# Altium PCB Fuse Block - Open (Box-KA11 Masterkit).PcbDoc
Units mm, origin at the board's own origin, x right, y up, seen from the top; angles counter-clockwise.
Board outline 82.5 x 57 mm, 2 copper layers (Top Layer, Bottom Layer); 13 components, 10 nets, 44 pads, 0 vias.
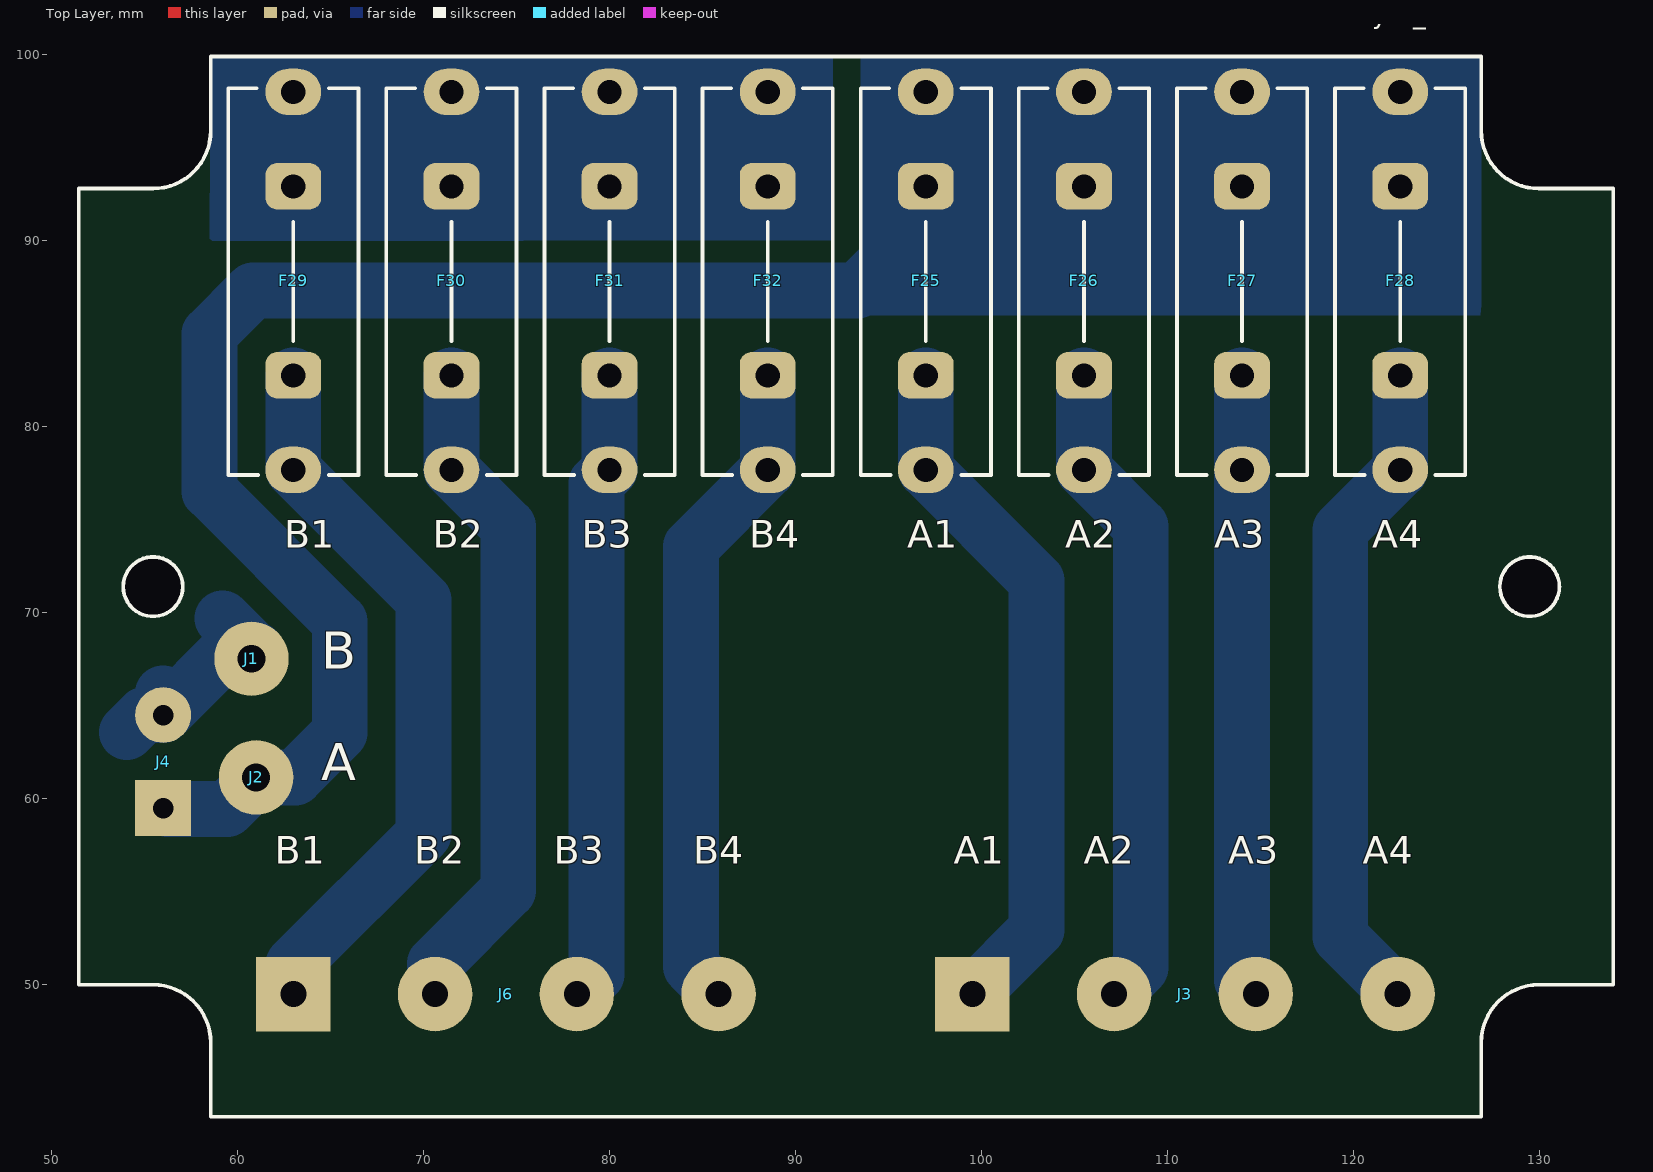
[diagram p0: Top Layer view]
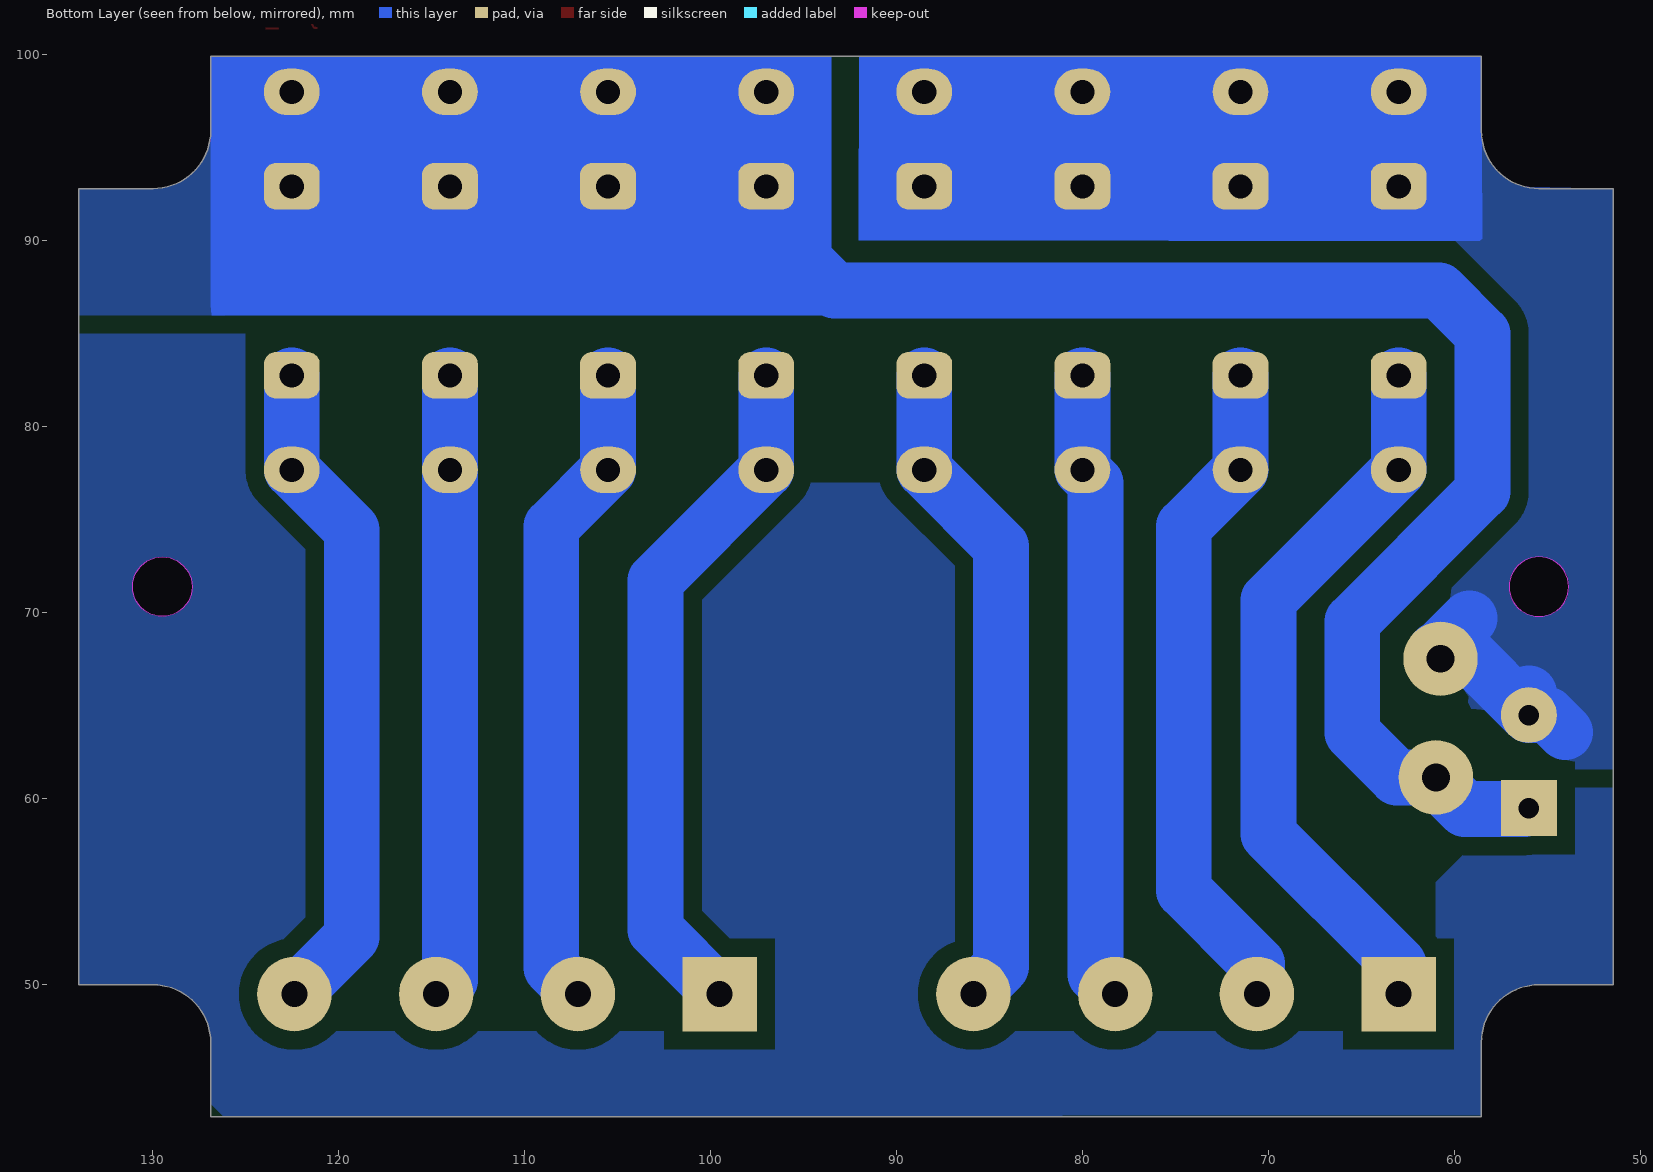
[diagram p1: Bottom Layer view, seen from below]

## Layer stack, top to bottom
Top Solder: solder mask 0.0102, Solder Resist, Dk 3.5
Top Layer: signal copper 0.0356
Dielectric 1: dielectric 0.32, FR-4, Dk 4.8
Bottom Layer: signal copper 0.0356
Bottom Solder: solder mask 0.0102, Solder Resist, Dk 3.5

## Board outline
51.458,50.002 55.458,50.002 cw(c55.458,46.902) 58.558,46.902 58.558,42.902 126.858,42.902 126.858,46.902 cw(c129.958,46.902) 129.958,50.002 133.958,50.002 133.958,92.802 129.958,92.802 cw(c129.958,95.902) 126.858,95.902 126.858,99.902 58.558,99.902 58.558,95.902 cw(c55.458,95.902) 55.458,92.802 51.458,92.802
cut-out: 55.458,69.802 cw(c55.458,71.402) 53.858,71.402 cw(c55.458,71.402) 55.458,73.002 cw(c55.458,71.402) 57.058,71.402 cw(c55.458,71.402)
cut-out: 127.858,71.402 ccw(c129.458,71.402) 129.458,69.802 ccw(c129.458,71.402) 131.058,71.402 ccw(c129.458,71.402) 129.458,73.002 ccw(c129.458,71.402)

## Design rules (kind name [scope] priority, off if disabled: settings)
Clearance [All] p1: gap=1
ComponentClearance [All] p1: gap=0 collisioncheckmode=3 verticalgap=0.2 showdistances=FALSE
Height [All] p1: minheight=0 maxheight=25 prefheight=12.7
HoleSize [All] p1: absolutevalues=TRUE maxlimit=3.2 minlimit=0.4 maxpercent=80.000 minpercent=20.000
HoleToHoleClearance [All] p1: gap=0.2 allowstackedmicrovias=TRUE
PlaneClearance [All] p1: clearance=0.5
PlaneConnect [All] p1: planeconnectstyle=Relief reliefexpansion=0.508 reliefentries=4 reliefconductorwidth=0.5 reliefairgap=0.5
PolygonConnect [All] p1: connectstyle=Relief reliefconductorwidth=0.5 reliefentries=4 polygonreliefangle="90 Angle" airgapwidth=0.5
RoutingVias [All] p1: holewidth=0.7 width=1.5 viastyle="Through Hole" minholewidth=0.4 minwidth=0.4 maxholewidth=3.2 maxwidth=7
SilkToSilkClearance [All] p1: silktosilkclearance=0.05
SilkToSolderMaskClearance [IsPad] p1: minsilkscreentomaskgap=0.2 clearancetoexposedcopper=TRUE
SolderMaskExpansion [All] p1: expansion=0.1
Width [All] p1: maxlimit=6 minlimit=0.2 preferedwidth=0.5
21 further rules are at their usual default settings.

## Components (designator, comment, footprint, x,y, rotation, side; value= is the part's Value field where it differs from the comment)
F25 "A" "Fuse 5x20 Open holder" 97,98 r270 top
F26 "A" "Fuse 5x20 Open holder" 105.5,98 r270 top
F27 "A" "Fuse 5x20 Open holder" 114,98 r270 top
F28 "A" "Fuse 5x20 Open holder" 122.5,98 r270 top
F29 "A" "Fuse 5x20 Open holder" 63,98 r270 top
F30 "A" "Fuse 5x20 Open holder" 71.5,98 r270 top
F31 "A" "Fuse 5x20 Open holder" 80,98 r270 top
F32 "A" "Fuse 5x20 Open holder" 88.5,98 r270 top
J1 "OnePinC" "OnePin 1.5x4" 60.75,67.525 r0 top
J2 "OnePinC" "OnePin 1.5x4" 61,61.15 r0 top
J3 "A" "TBC 7.62 - 4" 99.5,49.5 r0 top
J4 "Connector" "DG301 5mm 2p" 56,59.5 r90 top
J6 "B" "TBC 7.62 - 4" 63,49.5 r0 top

## Footprints (in the part's own frame and the unit in brackets; to place one, negate y for a bottom-side part, rotate by r counter-clockwise, add the part's x,y. Pads: shape width x height; smd on the part's side, far side on the other; paste and mask are expansions set on the pad)
"DG301 5mm 2p" [mm]
  rect 3x3 hole 1.1: 1(0,0)
  round 3 hole 1.1: 2(5,0)
  body extent -3.1,-3.4 7.5,4.2, height 10
"Fuse 5x20 Open holder" [mm] "Fuse horisontal"
  oval 2.5x3 hole 1.3: 1(0,0) 2(20.32,0)
  rrect50% 2.5x3 hole 1.3: 1(5.08,0) 2(15.24,0)
  silkscreen extent -0.2,-3.5 20.6,3.5, body extent -0.24,-3.5 20.56,3.5, height 9.99
"OnePin 1.5x4" [mm]
  round 4 hole 1.5: 1(0,0)
"TBC 7.62 - 4" [mm] "Terminal Block M3 screw"
  rect 4x4 hole 1.4: 1(0,0)
  round 4 hole 1.4: 2(7.62,0) 3(15.24,0) 4(22.86,0)
  body extent -3.81,-6.15 26.67,6.35, height 12.5

## Part data
F25 F26 F27 F28 F29 F30 F31 F32: library part Fuse, "Round fuse"
J1 J2: library part "OnePin Connector", "Only pad"
J3 J6: library part "TBC - 7.62 - 4", "Terminal Block 7.62"
J4: library part DG301-5.0-2P12, "DG301 series"

## Nets (pads, with @x,y where several pads share a name; then routed paths per layer and width w, separated by ;. In a path a pad name is that pad's centre, name@x,y a point inside that pad or via, vN(x,y) a via of type N, cw(c..) or ccw(c..) an arc to the next point about the centre after c; other vN are vias at no path point)
A: F25.1 F26.1 F27.1 F28.1 J2.1 J4.1 | length 78.2
  Bottom Layer w3: J4.1@56.25,59.45 59.45,59.45 61.15,61.15 63.1,61.15 65.5,63.55 65.5,69.525 58.5,76.525 58.5,85 60.825,87.325 93.325,87.325 97,91 F25.1@97,92.92
A1: F25.2 J3.1 | length 37.2
  Bottom Layer w3: F25.2@97,82.76 97,77.68 102.95,71.73 102.95,52.95 J3.1
A2: F26.2 J3.2 | length 35.1
  Bottom Layer w3: F26.2@105.5,82.76 105.5,77.68 108.55,74.63 108.55,50.93 J3.2
A3: F27.2 J3.3 | length 33.6
  Bottom Layer w3: F27.2@114,82.76 114,77.68 114,50.24 J3.3
A4: F28.2 J3.4 | length 35.9
  Bottom Layer w3: J3.4 119.275,52.585 119.275,74.455 122.5,77.68 F28.2@122.5,82.76
B: F29.1 F30.1 F31.1 F32.1 J1.1 J4.2 | length 12.6
  Bottom Layer w3: 54.05,63.575 54.975,64.5 J4.2 ; J4.2@56,65.675 J4.2 ; 59.2,69.7 61,67.9 61,68 59.5,68 J4.2
B1: F29.2 J6.1 | length 39.1
  Bottom Layer w3: J6.1 63,51.1 70,58.1 70,70.682 63,77.682 F29.2@63,82.76
B2: F30.2 J6.2 | length 36.2
  Bottom Layer w3: J6.2 70.62,51.145 74.55,55.075 74.55,74.63 71.5,77.68 F30.2@71.5,82.76
B3: F31.2 J6.3 | length 34
  Bottom Layer w3: J6.3 79.3,50.56 79.3,76.98 80,77.68 F31.2@80,82.76
B4: F32.2 J6.4 | length 35.6
  Bottom Layer w3: J6.4 84.375,50.985 84.375,73.555 88.5,77.68 F32.2@88.5,82.76

## Polygon pours and split planes (outlines as drawn)
no net on Bottom Layer "Top Layer-No Net" (solid, pour order 12): 133.925,42.9 133.925,99.825 133.958,99.858 133.915,99.9 51.5,99.9 51.5,43.5 51,43
A on Bottom Layer "Top Layer-No Net" (solid, pour order 10): 126.125,86 133.95,86 133.958,86.008 133.958,99.858 126.217,99.858 126.125,99.95
B on Bottom Layer "Top Layer-No Net" (solid, pour order 6): 66.9,99.9 66.9,91 64.662,91 58.305,83.9 58.126,83.7 58.126,76.9 58.126,76.2 63.945,69.7 64.214,69.4 64.214,67.5 64.214,67.4 62.692,65.7 62.513,65.5 60.274,65.5 60.185,65.5 57.409,62.4 56.693,61.6 51.5,61.6 51.5,99.9
B on Bottom Layer "Top Layer-No Net" (solid, pour order 2): 51.458,92.802 51.45,92.795 51.45,61.825 56.25,61.825 60.3,65.875 60.325,65.9 62.525,65.9 62.525,71.5 57.5,76.525 56.725,77.3 56.725,92.9

## Other copper
Top Layer:
  text ".Layer_Name" at 118.975,101.7 h1
Bottom Layer:
  pour cut-out: 125,85.5 125,78 121,74 121,51.5 124,48.5 123,47.5 97.5,47.5 97.5,51.5 99.5,51.5 101.5,53.5 101.5,71 95.5,77 89.5,77 89.5,76.5 86,73 86,49 84.5,47.5 61,47.5 61,55.5 59,57.5 64,62.5 64,85
  pour cut-out: 58.558,42.902 58.558,46.898 58.562,46.902 58.56,47.02 58.548,47.146 58.529,47.389 58.415,47.863 58.228,48.314 58.101,48.522 57.973,48.73 57.656,49.101 57.467,49.26 57.304,49.4 57.084,49.546 56.869,49.673 56.644,49.766 56.418,49.86 55.944,49.974 55.458,50.012 51.467,50.012 51.458,50.002 51.46,50 51.46,42.945
  pour cut-out: 126.86,99.9 126.86,95.905 126.855,95.9 126.858,95.783 126.87,95.657 126.889,95.414 127.003,94.939 127.189,94.488 127.317,94.28 127.444,94.072 127.761,93.701 127.95,93.543 128.114,93.403 128.334,93.257 128.548,93.129 128.774,93.036 128.999,92.943 129.474,92.829 129.96,92.79 133.95,92.79 133.96,92.8 133.958,92.802 133.958,99.858
  pour cut-out: 133.967,49.998 129.972,49.998 129.967,50.002 129.85,50 129.724,49.988 129.481,49.969 129.007,49.855 128.556,49.668 128.348,49.541 128.14,49.413 127.769,49.096 127.61,48.907 127.47,48.744 127.324,48.524 127.197,48.309 127.103,48.084 127.01,47.859 126.896,47.384 126.858,46.898 126.858,42.907 126.867,42.898 126.87,42.9 133.925,42.9
  pour cut-out: 51.458,92.802 55.453,92.802 55.458,92.798 55.575,92.8 55.701,92.812 55.944,92.831 56.418,92.945 56.869,93.132 57.077,93.259 57.285,93.387 57.656,93.704 57.815,93.893 57.955,94.056 58.101,94.276 58.228,94.491 58.322,94.716 58.415,94.941 58.529,95.416 58.567,95.902 58.567,99.893 58.558,99.902 58.555,99.9 51.5,99.9
  region net B: 58.558,99.902 58.5,90.1 58.65,90 75.35,90 92.025,90.025 92,99.9
  region net A: 126.858,99.902 126.858,86.558 126.8,86 93.5,86 93.5,99.9
  text ".Layer_Name" at 65,102 h1

## Silkscreen, mask and mechanical layers (free items; w line width, h text height)
Top Overlay:
  circle w0.2: c55.458,71.402 r1.6
  circle w0.2: c129.458,71.402 r1.6
  lines w0.2: 51.458,50.002 55.458,50.002 cw(c55.458,46.902) 58.558,46.902 58.558,42.902 126.858,42.902 126.858,46.902 cw(c129.958,46.902) 129.958,50.002 133.958,50.002 133.958,92.802 129.958,92.802 cw(c129.958,95.902) 126.858,95.902 126.858,99.902 58.558,99.902 58.558,95.902 cw(c55.458,95.902) 55.458,92.802 51.458,92.802 51.458,50.002
  text ".Layer_Name" at 118.975,101.7 h1
  text "B1" at 62.5,73.5 h1.5
  text "B2" at 70.5,73.5 h1.5
  text "B3" at 78.5,73.5 h1.5
  text "B4" at 87.5,73.5 h1.5
  text "A1" at 96,73.5 h1.5
  text "A2" at 104.5,73.5 h1.5
  text "A3" at 112.5,73.5 h1.5
  text "A4" at 121,73.5 h1.5
  text "B" at 64.5,67 h2
  text "A" at 64.5,61 h2
  text "B1" at 62,56.5 h1.5
  text "B2" at 69.5,56.5 h1.5
  text "B3" at 77,56.5 h1.5
  text "B4" at 84.5,56.5 h1.5
  text "A1" at 98.5,56.5 h1.5
  text "A2" at 105.5,56.5 h1.5
  text "A3" at 113.25,56.5 h1.5
  text "A4" at 120.5,56.5 h1.5
Bottom Overlay:
  text ".Layer_Name" at 65,102 h1
Top Solder:
  text ".Layer_Name" at 118.975,101.7 h1
Bottom Solder:
  text ".Layer_Name" at 65,102 h1
Mechanical 2:
  text "82 x 57 mm" at 51,105.25 h1
  text "BOX-KA11 (MasterKit)" at 50.975,103.475 h1
  text ".Pcb_File_Name_No_Path" at 50.925,101.425 h1
Mechanical 3:
  text "82 x 57 mm" at 134,105.25 h1
  text "BOX-KA11 (MasterKit)" at 133.975,103.475 h1
  text ".Pcb_File_Name_No_Path" at 133.925,101.425 h1

## Dimensions
52,43 to 134,43 on Mechanical 3
52,100 to 52,43 on Mechanical 3
52,100 to 52,43 on Mechanical 2
52,43 to 134,43 on Mechanical 2